# Allegro board B07_0526.brd
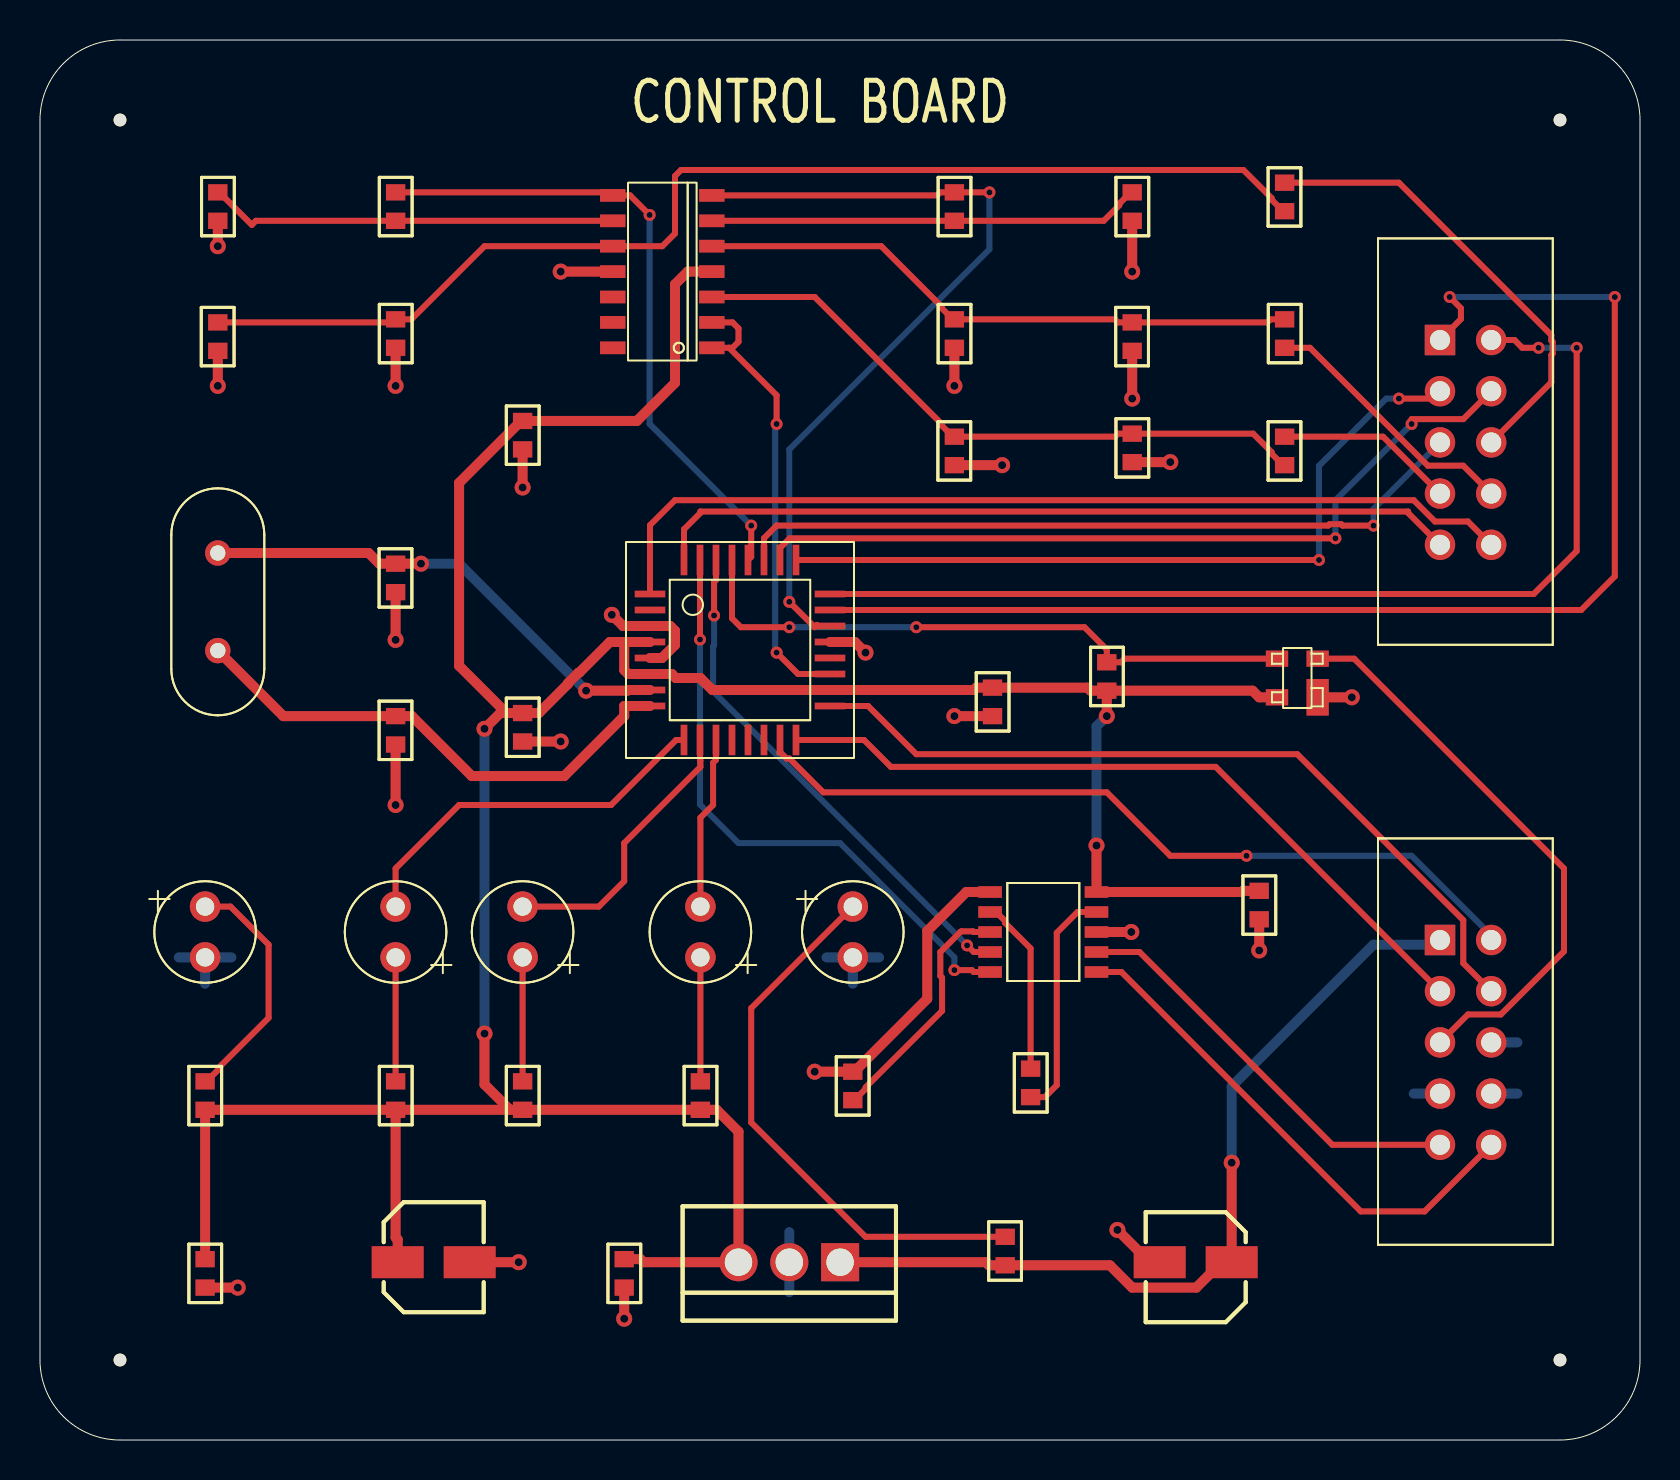
[diagram p0: board, top side]
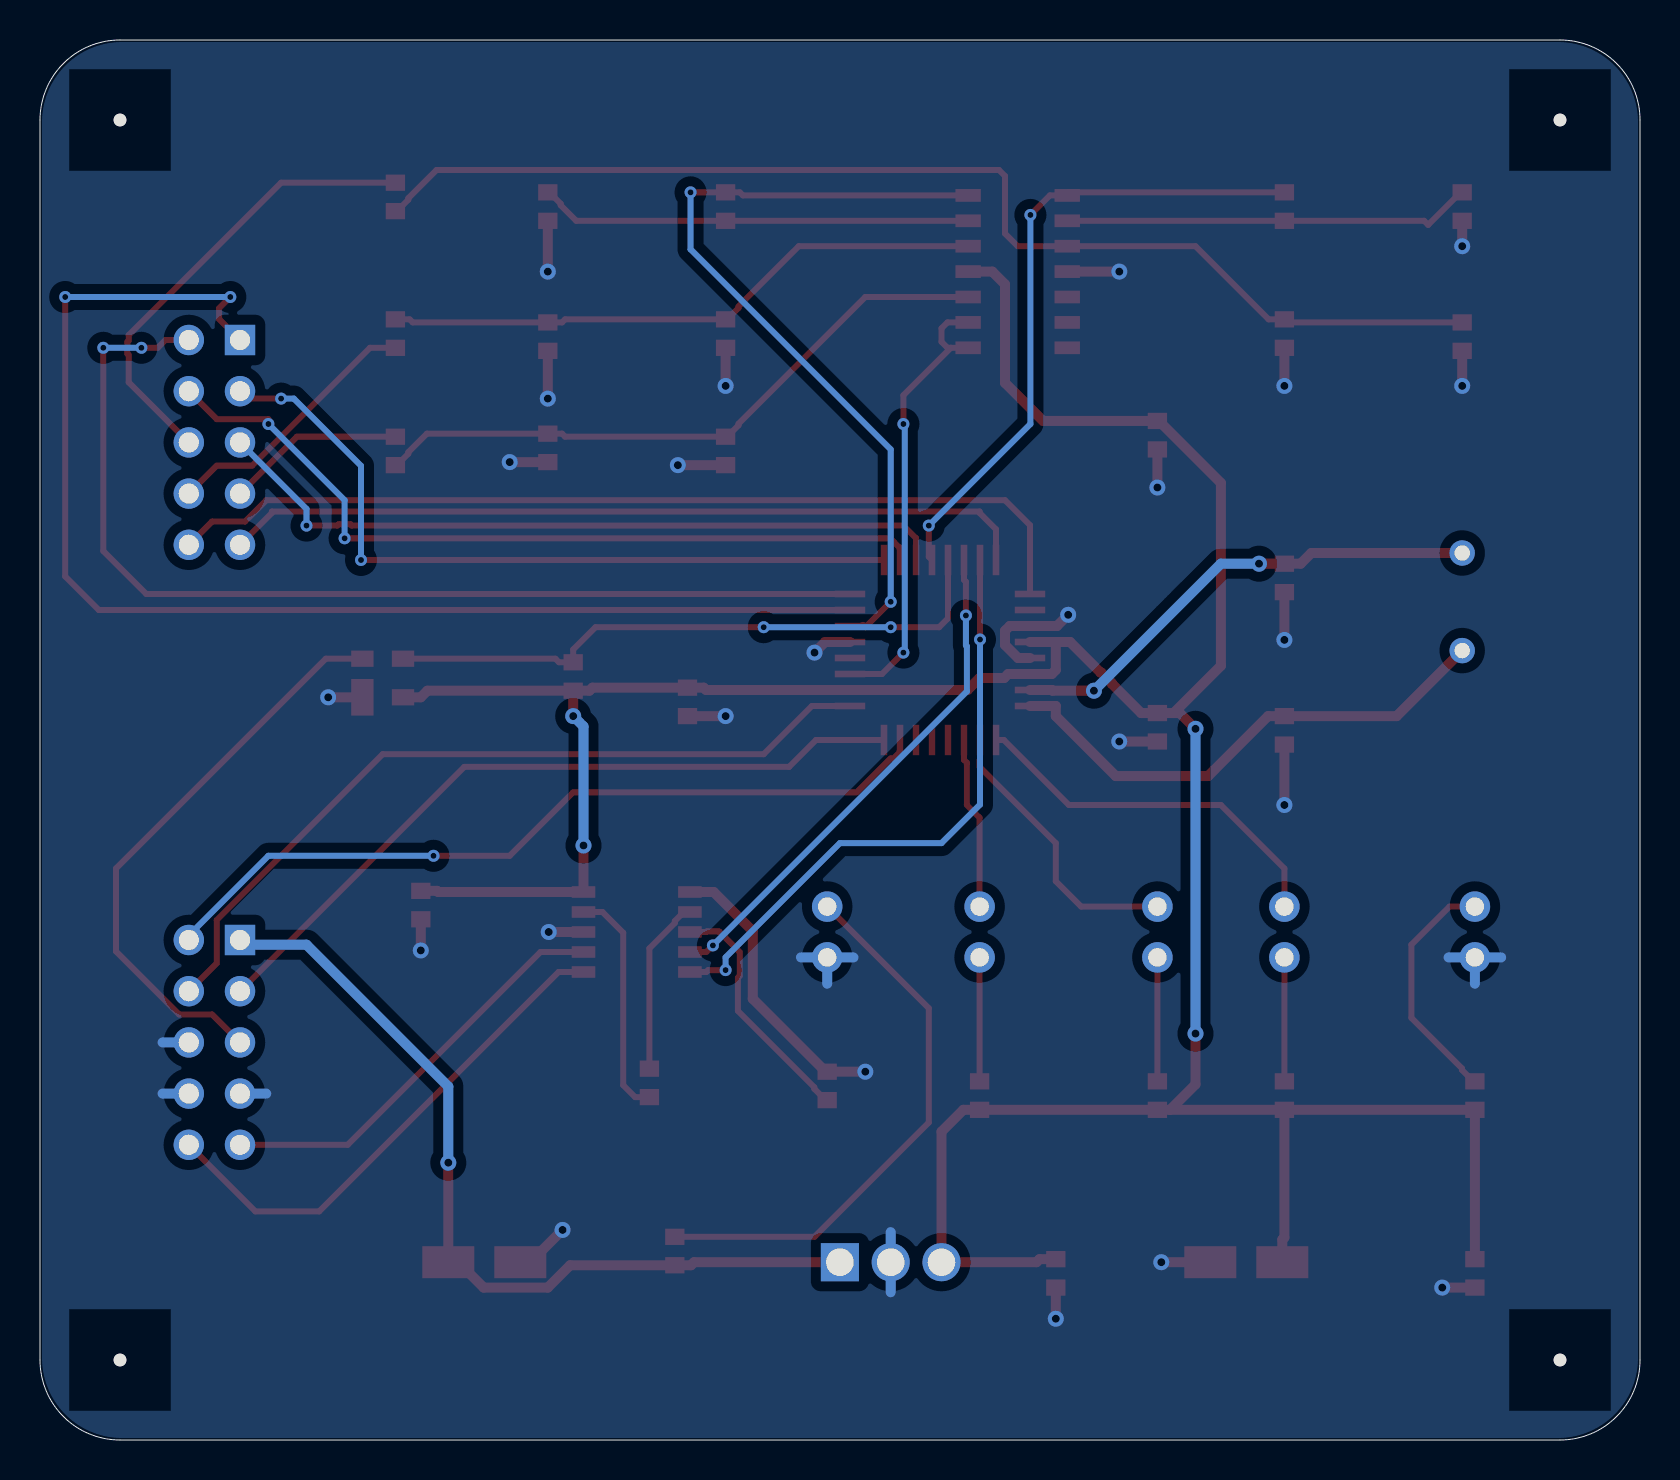
[diagram p1: board, bottom side, seen from below]

Outline 80 x 70 mm; copper layers: TOP, BOTTOM. Coordinates in mm from the lower left corner of the outline.
Outline path: 0,66 0,4 arc(1.17,1.17) 4,0 76,0 arc(78.83,1.17) 80,4 80,66 arc(78.83,68.83) 76,70 4,70 arc(1.17,68.83) 0,66

## Design rules (mm)
constraint set DEFAULT: min track width 0.3
nets with their own width: min track width 0.5; nets +5V +12V GND X1 X2

## Placement (name value [footprint] x y rotation side)
C1  20pF  [SMR0603]  17.78 43.81 270 top
C2  0.1uF  [SMR0603]  49.53 17.14 90 top
C3  20pF  [SMR0603]  17.78 36.2 270 top
C4  0.1uF  [SMR0603]  40.64 18.41 270 top
C5  0.1uF  [SMR0603]  54.61 48.9 90 top
C6  0.1uF  [SMR0603]  17.78 54.61 90 top
C7  0.1uF  [SMR0603]  45.72 54.61 90 top
C8  0.1uF  [SMR0603]  47.62 36.2 90 top
C9  0.1uF  [SMR0603]  24.13 34.92 90 top
C10  0.1uF  [SMR0603]  24.13 49.53 90 top
C11  0.1uF  [SMR0603]  8.26 7.62 90 top
C12  0.1uF  [SMR0603]  60.96 26.04 90 top
C13  0.1uF  [SMR0603]  29.21 7.62 90 top
C14  220uF/16V  [D55]  57.78 8.89 0 top
C15  220uF/16V  [D55]  19.68 8.89 180 top
D1  LED  [CAP196N]  17.78 26.67 180 top
D2  LED  [CAP196N]  24.13 26.67 180 top
D3  LED  [CAP196N]  33.02 26.67 180 top
D4  LED  [CAP196N]  40.64 24.13 0 top
D5  LED  [CAP196N]  8.26 24.13 0 top
J1  HEADER 10  [HEADER10]  70 25 0 top
J2  HEADER 10  [HEADER10]  70 55 0 top
NOREF  -  [unnamed]  4 66 0 top
NOREF#2  -  [#2]  76 66 0 top
NOREF#3  -  [#2]  0 42.57 0 top
NOREF#4  -  [#2]  67.27 0 90 top
NOREF#5  -  [#2]  68.99 0 90 top
NOREF#6  -  [unnamed]  4 4 0 top
NOREF#7  -  [unnamed]  76 66 0 top
NOREF#8  -  [#2]  76 66 90 top
NOREF#9  -  [unnamed]  76 4 0 top
NOREF#10  -  [#2]  18.59 0 90 top
R1  1K  [SMR0603]  53.34 37.47 90 top
R2  330  [SMR0603]  17.78 16.51 90 top
R3  330  [SMR0603]  24.13 16.51 90 top
R4  330  [SMR0603]  33.02 16.51 90 top
R5  1K  [SMR0603]  54.61 60.96 90 top
R6  1K  [SMR0603]  45.72 60.96 90 top
R7  1K  [SMR0603]  8.89 60.96 90 top
R8  1K  [SMR0603]  17.78 60.96 90 top
R9  10  [SMR0603]  62.23 50.16 270 top
R10  10  [SMR0603]  62.23 54.61 90 top
R11  10  [SMR0603]  62.23 62.87 270 top
R12  100K  [SMR0603]  54.61 55.88 270 top
R13  100K  [SMR0603]  8.89 55.88 270 top
R14  100K  [SMR0603]  45.72 50.16 270 top
R15  820  [SMR0603]  48.26 10.16 270 top
R16  330  [SMR0603]  8.26 16.51 90 top
U1  Atmega8  [TQFP32N]  35 39.5 0 top
U2  MIC811  [SOT143]  62.87 38.1 0 top
U3  ADM101E  [SOIC10]  50.16 25.4 0 top
U4  LM2902  [SOIC14]  31.11 58.42 180 top
U5  LM7805  [TO220AB]  40.01 8.89 180 top
Y1  16MHz  [CRYSTAL]  8.89 41.91 90 top

## Library data of the parts
C1-C13 = CAP NP
C14 C15 = CAP POL
D1-D5 = LED
J1 J2 = HEADER 10
R1-R16 = R
U1 = Atmega8
U2 = MIC811
U3 = ADM101E
U4 = LM2902_0: Tolerance: ***; User Part Number: ***
U5 = LM7805/TO_0
Y1 = CRYSTAL

## Footprints (pads in the part's own frame, mm; a bottom-side part is the same pattern mirrored in y, then rotated)
CAP196N
  round 1.524 hole 0.914: 1(0,0) 2(0,2.54)
CRYSTAL
  round 1.27 hole 0.762: 1(-2.44,0) 2(2.44,0)
D55
  rect 2.6x1.6 smd: 1(1.8,0) 2(-1.8,0)
HEADER10
  rect 1.52x1.52 hole 1: 1(0,0)
  round 1.52 hole 1: 2(2.56,0) 3(0,-2.56) 4(2.56,-2.56) 5(0,-5.12) 6(2.56,-5.12) 7(0,-7.68) 8(2.56,-7.68) 9(0,-10.24) 10(2.56,-10.24)
SMR0603
  rect 0.813x0.965 smd: 1(0,0) 2(1.422,0)
SOIC10
  rect 1.18x0.58 smd: 1(-2.66,2) 2(-2.66,1) 3(-2.66,0) 4(-2.66,-1) 5(-2.66,-2) 6(2.66,-2) 7(2.66,-1) 8(2.66,0) 9(2.66,1) 10(2.66,2)
SOIC14
  rect 1.27x0.635 smd: 1(-2.477,3.81) 2(-2.477,2.54) 3(-2.477,1.27) 4(-2.477,0) 5(-2.477,-1.27) 6(-2.477,-2.54) 7(-2.477,-3.81) 8(2.477,-3.81) 9(2.477,-2.54) 10(2.477,-1.27) 11(2.477,0) 12(2.477,1.27) 13(2.477,2.54) 14(2.477,3.81)
SOT143
  rect 1.118x1.829 smd: 1(1.016,-0.965)
  rect 1.118x0.813 smd: 2(1.016,0.965) 3(-1.016,0.965) 4(-1.016,-0.965)
TO220AB
  rect 1.905x1.905 hole 1.372: 1(0,0)
  round 1.905 hole 1.372: 2(2.54,0) 3(5.08,0)
TQFP32N
  rect 1.524x0.33 smd: 1(-4.5,2.8) 2(-4.5,2) 3(-4.5,1.2) 4(-4.5,0.4) 5(-4.5,-0.4) 6(-4.5,-1.2) 7(-4.5,-2) 8(-4.5,-2.8) 17(4.5,-2.8) 18(4.5,-2) 19(4.5,-1.2) 20(4.5,-0.4) 21(4.5,0.4) 22(4.5,1.2) 23(4.5,2) 24(4.5,2.8)
  rect 0.33x1.524 smd: 9(-2.8,-4.5) 10(-2,-4.5) 11(-1.2,-4.5) 12(-0.4,-4.5) 13(0.4,-4.5) 14(1.2,-4.5) 15(2,-4.5) 16(2.8,-4.5) 25(2.8,4.5) 26(2,4.5) 27(1.2,4.5) 28(0.4,4.5) 29(-0.4,4.5) 30(-1.2,4.5) 31(-2,4.5) 32(-2.8,4.5)
unnamed
  round 0.635 hole 3 unplated: (0,0)

## Nets
+5V: C8.2 C9.2 C10.2 C11.2 C12.2 C13.2 C15.1 R1.1 R2.1 R3.1 R4.1 R16.1 U1.4 U1.6(VCC#6) U1.18 U2.4(VCC) U3.10(VCC) U4.4 U5.3(VOUT)
+12V: C14.1 J1.1 R15.2 U5.1
GND: C1.2 C3.2 C4.1 C5.1 C6.1 C7.1 C8.1 C9.1 C10.1 C11.1 C12.1 C13.1 C14.2 C15.2 D4.1(CATHODE) D5.1(CATHODE) J1.6 J1.7 J1.8 R5.1 R7.1 R12.2 R13.2 R14.2 U1.3 U1.5 U1.21 U2.1 U3.1 U3.8 U4.11 U5.2
#ADC1: U1.19 U4.1 U4.2
#ADC2: R6.2 U1.22 U4.7
#COMP1: J2.9 U1.32
#COMP2: J2.10 U1.1
#TEMP: R8.2 U1.28 U4.8
ADC1: J2.7 R9.1
ADC2: J2.8 R10.1
MISO: J1.3 U1.16
MOSI: J1.2 U1.15
PC0: J2.1 U1.23
PC1: J2.2 U1.24
PC2: J2.3 U1.25
PC3: J2.4 U1.26
PC4: J2.5 U1.27
RESET: J1.5 U2.2
RX: J1.10 U3.6
RXD: U1.30 U3.4
SCK: J1.4 U1.17
TEMP: J2.6 R11.1
TX: J1.9 U3.7
TXD: U1.31 U3.5
X1: C1.1 U1.7 Y1.2
X2: C3.1 U1.8 Y1.1
N01844: R1.2 U1.29 U2.3
N01932: D1.1(CATHODE) U1.9
N01936: D2.1(CATHODE) U1.10
N01940: D3.1(CATHODE) U1.11
N01997: D1.2 R2.2
N02035: D2.2 R3.2
N02064: D3.2 R4.2
N03038: C4.2 U3.3
N03155: C2.2 U3.2
N03167: C2.1 U3.9
N03417: C5.2 R9.2 R14.1 U4.3
N03671: C7.2 R10.2 R12.1 U4.5
N03864: R5.2 R6.1 U4.6
N04233: C6.2 R11.2 R13.1 U4.10
N04310: R7.2 R8.1 U4.9
N05379: D4.2 R15.1
N012101: D5.2 R16.2

Pads without a net: U1 2 12 13 14 20; U4 12 13 14

## Via types
v1: diameter 0.6, hole 0.3, TOP to BOTTOM, 23 vias
v2: diameter 0.8, hole 0.4, TOP to BOTTOM, 31 vias

## Routing (per net, layer and track width the routed paths; a pad name or vN(x,y) marks a point on that pad's centre or on a via; arc(x,y) is an arc through that point)
+5V: length 169.8
  TOP w0.5: v2(22.23,35.56) 23.01,36.35 23.32,36.35 ; R1.1 52.53,37.47 52.38,37.62 C8.2 46.81,37.62 46.7,37.5 U1.18 33.62,37.5 33.02,38.1 31.79,38.1 31.59,38.3 U1.6 29.41,38.3 29.21,38.5 29.21,39.9 ; R1.1 v2(53.34,36.2) ; R1.1 60.63,37.47 60.96,37.13 61.85,37.13 ; 23.32,36.35 20.95,38.71 20.95,47.85 24.05,50.95 C10.2 29.84,50.95 31.75,52.86 31.75,57.78 32.38,58.42 U4.4 ; 23.32,36.35 C9.2 24.94,36.35 26.4,37.81 26.4,37.84 26.93,38.37 26.96,38.37 28.5,39.9 29.21,39.9 ; v2(52.83,29.73) U3.10 60.09,27.4 60.15,27.46 C12.2 ; C11.2 R16.1 R2.1 ; U1.4 29.21,39.9 ; C15.1 17.89,10.02 17.78,10.12 R2.1 ; C13.2 30.02,9.04 30.18,8.89 34.92,8.89 34.92,15.42 33.83,16.51 R4.1 R3.1 23.5,16.51 ; v2(22.23,20.32) 22.23,17.78 23.5,16.51 ; R2.1 23.5,16.51
  BOTTOM w0.5: v2(22.23,35.56) v2(22.23,20.32) ; v2(53.34,36.2) 52.83,35.68 v2(52.83,29.73)
+12V: length 43
  TOP w0.5: v2(59.59,13.87) C14.1 59.09,8.89 57.81,7.62 54.61,7.62 53.49,8.74 R15.2 47.45,8.74 47.3,8.89 U5.1
  BOTTOM w0.5: v2(59.59,13.87) 59.59,17.68 66.67,24.77 69.85,24.77 69.85,25 J1.1
GND: length 80.2
  TOP w0.5: C11.1 v2(9.89,7.62) ; C13.1 v2(29.21,6.06) ; C6.1 v2(17.78,52.7) ; C14.2 55.48,8.89 v2(53.87,10.5) ; R5.1 v2(54.61,58.42) ; U1.21 40.74,39.9 v2(41.27,39.37) ; C8.1 v2(45.72,36.2) ; R12.2 v2(54.61,52.07) ; U2.1 v2(65.59,37.13) ; R7.1 v2(8.89,59.69) ; C5.1 v2(56.52,48.9) ; v2(38.73,18.41) C4.1 40.72,18.41 44.36,22.06 44.36,25.45 46.31,27.4 U3.1 ; C7.1 v2(45.72,52.7) ; C12.1 v2(60.96,24.48) ; U3.8 v2(54.56,25.4) ; v2(28.59,41.26) 29.15,40.7 U1.3 31.51,40.7 31.75,40.46 31.75,39.75 31.1,39.1 U1.5 ; C10.1 v2(24.13,47.62) ; R14.2 v2(48.11,48.74) ; C9.1 v2(26.04,34.92) ; C1.2 v2(17.78,40.01) ; U4.11 v2(26.04,58.42) ; C15.2 v2(23.93,8.89) ; R13.2 v2(8.89,52.7) ; C3.2 v2(17.78,31.75)
  BOTTOM w0.5: 37.47,7.39 U5.2 37.47,10.39 ; 39.33,24.13 D4.1 ; D4.1 40.64,22.82 ; D4.1 41.95,24.13 ; 68.69,17.32 J1.7 ; J1.8 73.87,17.32 ; J1.6 73.87,19.88 ; 8.26,22.82 D5.1 ; D5.1 6.94,24.13 ; D5.1 9.57,24.13
#ADC1: length 23.1
  TOP w0.3: 34.46,54.61 34.62,54.61 34.92,54.91 34.92,55.58 34.62,55.88 U4.2 ; 34.46,54.61 U4.1 ; 34.46,54.61 36.83,52.24 v1(36.83,50.8) ; U1.19 37.9,38.3 v1(36.83,39.37)
  BOTTOM w0.3: v1(36.83,50.8) 36.76,50.8 36.76,39.37 v1(36.83,39.37)
#ADC2: length 41.2
  TOP w0.3: U1.22 38.9,40.7 38.85,40.75 38.73,40.64 v1(37.47,41.91) ; v1(47.47,62.38) R6.2 45.01,62.38 44.85,62.23 U4.7
  BOTTOM w0.3: v1(37.47,41.91) 37.47,49.53 47.47,59.54 v1(47.47,62.38)
#COMP1: length 40.5
  TOP w0.3: U1.32 32.2,45.53 33.02,46.35 33.02,46.42 68.41,46.42 68.41,46.35 J2.9
#COMP2: length 46.9
  TOP w0.3: U1.1 30.5,45.74 31.75,46.99 68.68,46.99 69.75,45.92 71.4,45.92 J2.10
#TEMP: length 32.7
  TOP w0.3: U1.28 35.56,44.16 v1(35.56,45.72) ; v1(30.48,61.25) 29.5,62.23 U4.8 28.57,62.23 28.57,62.38 R8.2
  BOTTOM w0.3: v1(35.56,45.72) 30.48,50.8 v1(30.48,61.25)
ADC1: length 8.9
  TOP w0.3: J2.7 67.16,50.16 R9.1
ADC2: length 13.3
  TOP w0.3: J2.8 71.16,48.72 69.39,48.72 63.5,54.61 R10.1
MISO: length 37.4
  TOP w0.3: J1.3 58.78,33.66 42.55,33.66 41.2,35 U1.16
MOSI: length 40.2
  TOP w0.3: U1.15 37,34.4 37.33,34.08 37.47,34.08 39.16,32.38 53.34,32.38 56.52,29.21 v1(60.33,29.21) ; J1.2 v1(72.56,25.23)
  BOTTOM w0.3: v1(72.56,25.23) 68.58,29.21 v1(60.33,29.21)
PC0: length 65
  TOP w0.3: U1.23 77.06,41.5 78.74,43.18 v1(78.74,57.15) ; v1(70.48,57.15) 71.05,56.59 71.05,56.05 J2.1
  BOTTOM w0.3: v1(78.74,57.15) v1(70.48,57.15)
PC1: length 52.8
  TOP w0.3: U1.24 74.69,42.3 76.83,44.45 v1(76.83,54.61) ; J2.2 73.72,55 74.11,54.61 v1(74.93,54.61)
  BOTTOM w0.3: v1(76.83,54.61) v1(74.93,54.61)
PC2: length 38.5
  TOP w0.3: J2.3 69.63,52.07 v1(67.94,52.07) ; U1.25 v1(63.95,44)
  BOTTOM w0.3: v1(67.94,52.07) 67.31,52.07 63.95,48.71 v1(63.95,44)
PC3: length 40.7
  TOP w0.3: J2.4 71.16,51.04 68.58,51.04 v1(68.58,50.8) ; v1(64.77,45.09) 37.49,45.09 37,44.6 U1.26
  BOTTOM w0.3: v1(64.77,45.09) 64.77,46.99 v1(68.58,50.8)
PC4: length 37.4
  TOP w0.3: U1.27 36.2,45.09 36.83,45.72 64.41,45.72 64.48,45.79 65.06,45.79 65.13,45.72 v1(66.67,45.72)
  BOTTOM w0.3: v1(66.67,45.72) 66.67,46.55 J2.5
RESET: length 28.9
  TOP w0.3: U2.2 65.71,39.07 76.2,28.57 76.2,24.43 73.04,21.28 71.4,21.28 J1.5
RX: length 26.1
  TOP w0.3: U3.6 54.07,23.4 66.04,11.43 69.23,11.43 J1.10
RXD: length 25.9
  TOP w0.3: U3.4 46.68,24.4 v1(46.35,24.73) ; U1.30 33.8,43.01 33.7,42.91 v1(33.7,41.23)
  BOTTOM w0.3: v1(33.7,41.23) 33.7,39.73 33.66,39.68 33.66,37.43 v1(46.35,24.73)
SCK: length 40.2
  TOP w0.3: U1.17 41.41,36.7 43.81,34.29 62.87,34.29 71.16,25.99 71.16,23.84 J1.4
TEMP: length 23.2
  TOP w0.3: J2.6 75.56,52.88 75.56,54.25 75.63,54.32 75.63,54.9 75.56,54.97 75.56,55.24 67.94,62.87 R11.1
TX: length 21.2
  TOP w0.3: J1.9 64.61,14.76 54.98,24.4 U3.7
TXD: length 30.6
  TOP w0.3: U3.5 46.68,23.4 46.59,23.5 v1(45.72,23.5) ; U1.31 v1(33,40.02)
  BOTTOM w0.3: v1(33,40.02) 33,31.77 34.92,29.84 40.01,29.84 45.72,24.13 v1(45.72,23.5)
X1: length 24.5
  TOP w0.5: Y1.2 16.43,44.35 16.97,43.81 C1.1 v2(19.05,43.81) ; v2(27.3,37.47) 29.37,37.47 29.41,37.5 U1.7
  BOTTOM w0.5: v2(27.3,37.47) 20.95,43.81 v2(19.05,43.81)
X2: length 26
  TOP w0.5: U1.8 29.21,36.7 29.21,36.2 26.21,33.2 21.59,33.2 18.59,36.2 C3.1 12.16,36.2 Y1.1
N01844: length 31.5
  TOP w0.3: U1.29 34.6,41.08 35.04,40.64 v1(37.47,40.64) ; v1(43.81,40.64) 52.22,40.64 53.34,39.52 R1.2 54.05,38.89 54.23,39.07 61.85,39.07
  BOTTOM w0.3: v1(43.81,40.64) v1(37.47,40.64)
N01932: length 19
  TOP w0.3: D1.1 17.78,28.57 20.95,31.75 28.55,31.75 31.8,35 U1.9
N01936: length 14.3
  TOP w0.3: U1.10 33,34.01 33.02,33.99 33.02,33.66 29.21,29.84 29.21,27.94 27.94,26.67 D2.1
N01940: length 8.7
  TOP w0.3: U1.11 33.8,34.01 33.66,33.86 33.66,31.75 33.02,31.11 D3.1
N01997: length 6.2
  TOP w0.3: D1.2 R2.2
N02035: length 6.2
  TOP w0.3: D2.2 R3.2
N02064: length 6.2
  TOP w0.3: D3.2 R4.2
N03038: length 12.3
  TOP w0.3: U3.3 46.68,25.4 46.65,25.43 46.06,25.43 46.03,25.4 46.02,25.4 45.02,24.4 45.02,23.2 45.1,23.12 45.1,21.46 41.29,17.64 41.29,17.56 40.72,16.99 C4.2
N03155: length 8.8
  TOP w0.3: U3.2 47.81,26.4 48.26,25.95 48.26,25.85 49.53,24.58 C2.2
N03167: length 11.6
  TOP w0.3: C2.1 50.24,17.14 50.84,17.74 50.84,25.36 51.88,26.4 U3.9
N03417: length 32.3
  TOP w0.3: R9.2 62.15,48.74 61.58,49.31 61.58,49.39 60.66,50.32 C5.2 53.9,50.32 53.74,50.16 R14.1 45.64,50.16 45.07,50.73 45.07,50.81 38.73,57.15 U4.3
N03671: length 30.3
  TOP w0.3: U4.5 42.06,59.69 45.07,56.68 45.07,56.6 45.64,56.03 C7.2 53.74,56.03 53.9,55.88 R12.1 61.37,55.88 61.52,56.03 R10.2
N03864: length 21.7
  TOP w0.3: R5.2 54.53,62.38 53.96,61.81 53.96,61.74 53.19,60.96 R6.1 U4.6
N04233: length 59.2
  TOP w0.3: R11.2 62.15,61.44 61.58,62.01 61.58,62.09 60.17,63.5 32.05,63.5 31.75,63.2 31.75,60.33 31.11,59.69 U4.10 22.23,59.69 18.57,56.03 C6.2 17.78,55.88 R13.1
N04310: length 20.5
  TOP w0.3: U4.9 R8.1 10.79,60.96 10.59,60.76 8.97,62.38 R7.2
N05379: length 28
  TOP w0.3: D4.2 35.56,21.59 35.56,15.88 41.27,10.16 R15.1
N012101: length 12.2
  TOP w0.3: R16.2 8.33,17.93 8.9,18.5 8.9,18.58 11.43,21.11 11.43,24.77 9.53,26.67 D5.2

## Copper pours and planes (outline as drawn; the poured copper is in the pictures)
GND on BOTTOM: 0.1,4.1 1.27,1.27 4.1,0.1 75.9,0.1 78.73,1.27 79.9,4.1 79.9,65.9 78.73,68.73 75.9,69.9 4.1,69.9 1.27,68.73 0.1,65.9 ; 11 cut-outs

## Text on the board
Ref Des/Silkscreen Top: CONTROL BOARD
TOLERANCE_TOP: FIGURE | FINISHED_SIZE | 0.3 | 0.4 | 0.762 | 0.9144 | 1.0 | 1.3716 | 3.0 | DRILL CHART: TOP to BOTTOM | ALL UNITS ARE IN MILLIMETERS | PLATED | NON-PLATED | QTY | 23 | 31 | 2 | 10 | 20 | 3 | 4
